# EAGLE board astable multivibrator 555 (EAGLE 7.2.0)
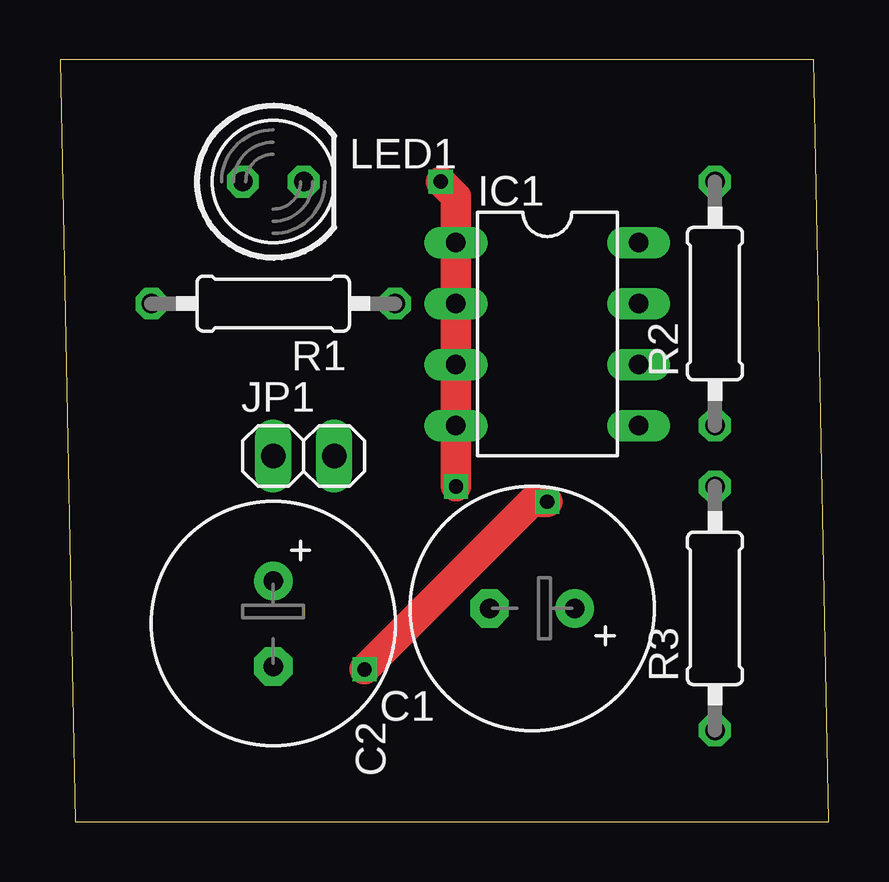
[diagram p0: board, top side]
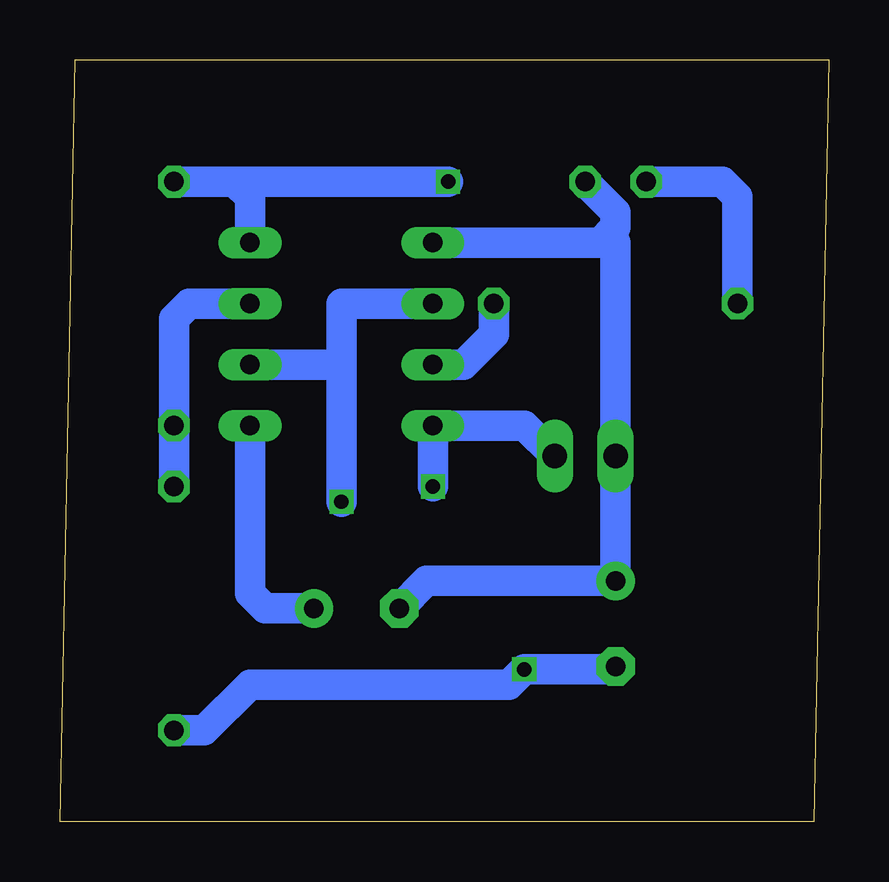
[diagram p1: board, bottom side, seen from below]

Size 32.05 x 31.74 mm. Coordinates in mm from the lower left corner, seen from the top.
Outline: 0.64,0 32.05,0 31.42,31.74 0,31.74 0.64,0
Copper layers (1*16): Top 0.035mm / dielectric 1.5mm / Bottom 0.035mm
Design rules "default": minimum track width 10mil, minimum drill 24mil, track to track 8mil, track to pad 8mil, pad to pad 8mil, via to via 8mil, smd to smd 8mil, copper to edge 40mil, drill to drill 8mil, minimum pad ring 10mil, minimum via ring 8mil, stop-mask expansion 4mil, vias tented up to drill 0mil, thermal gap 10mil

## Footprints (pad centres in the part's own frame; a part is rotated, then mirrored left to right if it is on the bottom)
E3,5-10 = drill 0.813 pad 1.6: + -1.778,0 | drill 0.813 pad 1.6 octagon: - 1.778,0
DIL08 = drill 0.813 long: 1 -3.81,-3.81; 2 -1.27,-3.81; 3 1.27,-3.81; 4 3.81,-3.81; 5 3.81,3.81; 6 1.27,3.81; 7 -1.27,3.81; 8 -3.81,3.81
1X02 = drill 1.016 long: 1 -1.27,0; 2 1.27,0
LED5MM = drill 0.813 octagon: A -1.27,0; K 1.27,0
0207/10 = drill 0.813 octagon: 1 -5.08,0; 2 5.08,0

## Placement (x,y rotation side)
C1  [E3,5-10]  19.69,8.89 180 top
C2  10uf  [E3,5-10]  8.89,8.26 270 top
IC1  LM555N  [DIL08]  20.32,20.32 270 top
JP1  [1X02]  10.16,15.24 0 top
LED1  [LED5MM]  8.89,26.67 0 top
R1  [0207/10]  8.89,21.59 180 top
R2  10k  [0207/10]  27.31,21.59 90 top
R3  33k  [0207/10]  27.31,8.89 90 top

## Library data of the parts
C1 C2 R1-R3 = rcl
IC1 = linear
JP1 = pinhead
LED1 = led

## Nets
0V: C1.- C2.+ IC1.1 JP1.1 LED1.K
+5V: IC1.4 IC1.8 JP1.2 R2.2
N$1: C2.- IC1.2 IC1.6 R3.1
N$4: LED1.A R1.2
N$5: IC1.3 R1.1
N$6: C1.+ IC1.5
N$7: IC1.7 R2.1 R3.2

## Tracks (layer width: path | path; a pad name or v marks a point on that pad's centre or on a via)
0V
  Bottom 1.27: IC1.1 9.53,24.13 | 9.53,24.13 8.89,24.13 JP1.1 C2.+ 16.76,10.03 C1.- | LED1.K 8.89,25.4 8.89,24.77 9.53,24.13
+5V  (via drill 0.6)
  Top 1.27: v16.51,13.97 16.51,26.04 v15.88,26.67
  Bottom 1.27: JP1.2 12.7,16.51 IC1.4 v16.51,13.97 | 24.77,26.67 24.13,26.04 IC1.8 23.5,24.13 | 24.77,26.67 R2.2 | v15.88,26.67 24.77,26.67
N$1  (via drill 0.6)
  Top 1.27: v20.32,13.34 19.69,13.34 v12.7,6.35
  Bottom 1.27: IC1.2 20.32,21.59 20.32,19.05 | 20.32,19.05 v20.32,13.34 | C2.- 9.02,6.35 v12.7,6.35 13.33,5.71 24.13,5.71 26.04,3.81 R3.1 | IC1.6 20.32,19.05
N$4
  Bottom 1.27: LED1.A 4.45,26.67 3.81,26.04 R1.2
N$5
  Bottom 1.27: R1.1 13.97,20.32 15.24,19.05 IC1.3
N$6
  Bottom 1.27: C1.+ 23.5,8.89 24.13,9.53 IC1.5
N$7
  Bottom 1.27: R3.2 R2.1 27.31,20.95 26.67,21.59 IC1.7